# Altium PCB blankPCB.PcbDoc
Units mil, origin at the board's own origin, x right, y up, seen from the top; angles counter-clockwise.
Board outline 6005 x 3025 mil, 2 copper layers (Top Layer, Bottom Layer); 27 components, 48 nets, 167 pads, 129 vias.
Unrouted connection lines stored in the file: 20.
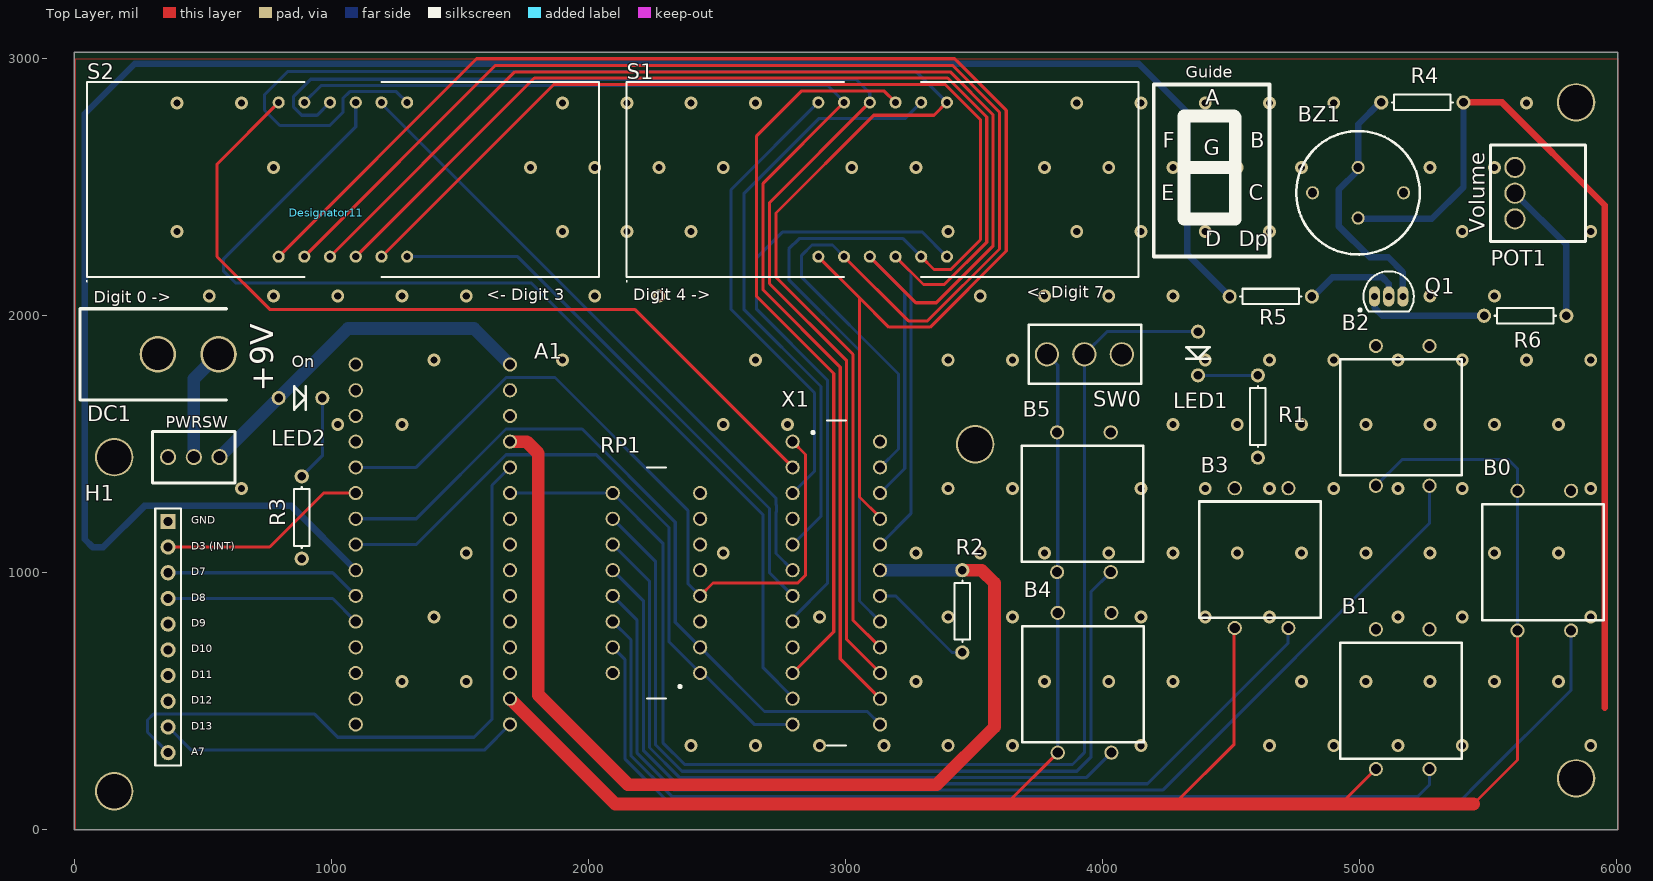
[diagram p0: Top Layer view]
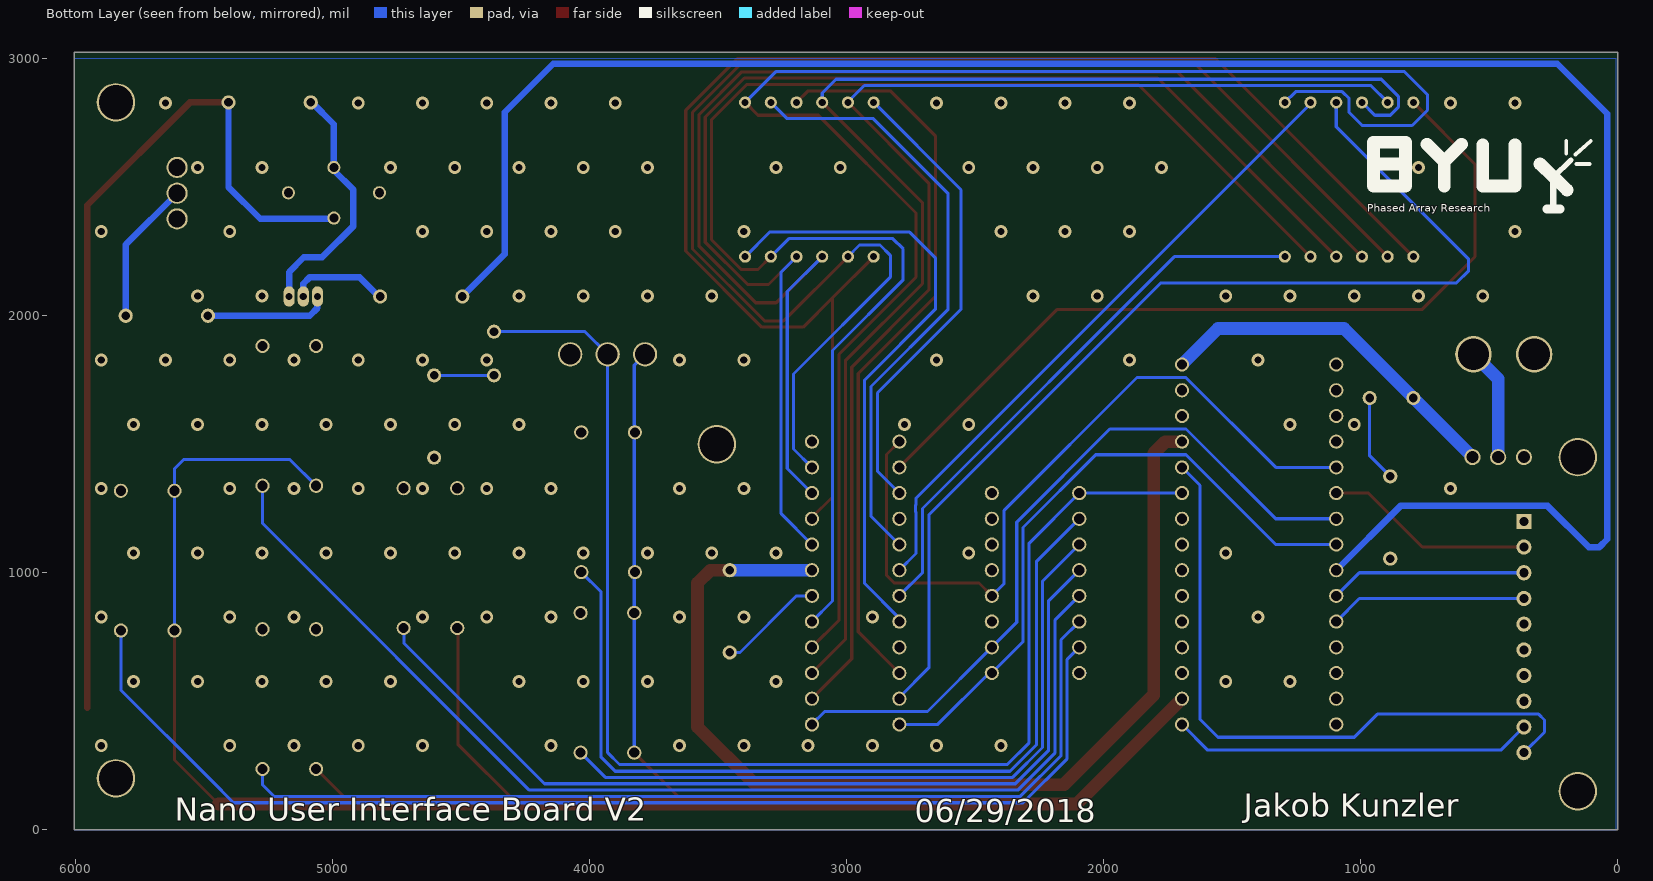
[diagram p1: Bottom Layer view, seen from below]

## Layer stack, top to bottom
Top Solder: solder mask 0.4, Solder Resist, Dk 3.5
Top Layer: signal copper 1.4
Dielectric 1: dielectric 12.6, FR-4, Dk 4.8
Bottom Layer: signal copper 1.4
Bottom Solder: solder mask 0.4, Solder Resist, Dk 3.5

## Board outline
0,0 0,3025 6005,3025 6005,0

## Design rules (kind name [scope] priority, off if disabled: settings)
BoardOutlineClearance [All] p1: gap=15 ignorepadtopadclearanceinfootprint=FALSE
Clearance [All] p1: gap=12 ignorepadtopadclearanceinfootprint=TRUE
ComponentClearance "BYU LOGO" [HasFootprint('BYU_Logo')] p1: gap=0 collisioncheckmode=3 verticalgap=0 showdistances=FALSE
ComponentClearance [All] p2: gap=1 collisioncheckmode=3 verticalgap=1 showdistances=FALSE
DiffPairsRouting [All] p1: maxlimit=393.7 minlimit=6 mostfreqgap=8 toplayer_minwidth=6 toplayer_maxwidth=15 toplayer_prefwidth=8 bottomlayer_minwidth=6 bottomlayer_maxwidth=15 bottomlayer_prefwidth=8 maxuncoupledlength=500
HoleSize [All] p1: absolutevalues=TRUE maxlimit=265 minlimit=10 maxpercent=80.000 minpercent=20.000
HoleToHoleClearance [All] p1: gap=10 allowstackedmicrovias=FALSE
MinimumAnnularRing [All] p1: minimumring=7
MinimumSolderMaskSliver [All] p1: minsoldermaskwidth=0
PlaneClearance [All] p1: clearance=10
PlaneConnect [All] p1: planeconnectstyle=Direct reliefexpansion=16 reliefentries=4 reliefconductorwidth=6 reliefairgap=6
PolygonConnect [All] p1: connectstyle=Relief reliefconductorwidth=8 reliefentries=4 polygonreliefangle="90 Angle" airgapwidth=6
RoutingCorners [All] p1: cornerstyle=45-Degree minsetback=49.21 maxsetback=49.21
RoutingVias [All] p1: holewidth=15 width=30 viastyle="Through Hole" minholewidth=13 minwidth=27 maxholewidth=100 maxwidth=114
SilkToSilkClearance [All] p1: silktosilkclearance=0
SilkToSolderMaskClearance [IsPad] p1: minsilkscreentomaskgap=6 clearancetoexposedcopper=TRUE
SolderMaskExpansion [All] p1: expansion=2.95
Width [All] p1: maxlimit=400 minlimit=6 preferedwidth=8
20 further rules are at their usual default settings.

## Classes and differential pairs
component class U_Sound: BZ1 POT1 Q1 R4 R5 R6
component class U_ButtonAndSwitches: B0 B1 B2 B3 B4 B5 LED1 R1 SW0
component class U_ArduinoNano: A1
component class U_7segments: R2 S1 S2 X1
component class TopLevel: DC1 H1 LED2 PWRSW R3 RP1

## Components (designator, comment, footprint, x,y, rotation, side; value= is the part's Value field where it differs from the comment)
A1 "DFR0010" ArduinoNano 1095.17,1809.99 r0 top
B0 "COM-09190" COM-09190 5615.24,775 r0 top
B1 "COM-09190" COM-09190 5064.05,236.22 r0 top
B2 "COM-09190" COM-09190 5064.05,1338.58 r0 top
B3 "COM-09190" COM-09190 4515,785 r0 top
B4 "COM-09190" COM-09190 3826.34,300 r0 top
B5 "COM-09190" COM-09190 3823.84,1002.5 r0 top
BZ1 "PS1240P02BT" PS1240P02BT 4995,2478.43 r0 top
DC1 "PJ-037A" PJ-037A 561.22,1850 r180 top
Designator11 "Comment" BYU_Logo 980,2400 r180 top
H1 "68016-210HLF" Header1X10 365,1200 r270 top
LED1 "LTL-4223" "LED Through" 4372.08,1948 r270 top
LED2 "LTL-4223" "LED Through" 785,1680 r0 top
POT1 "3310R-125-103L" 3310R-001 5605,2576.85 r270 top
PWRSW "200MSP1T1B1M2QEH" 200MSP1T1B1M2QEH 365,1450 r0 top
Q1 "2N3904BU" 2N3904 5114.05,2075 r270 top
R1 "100" "Resistor Through Hole" 4604.99,1768 r270 top
R2 "9.53k" "Resistor Through Hole" 3455,690 r90 top
R3 "1k" "Resistor Through Hole" 885,1375 r270 top
R4 "1k" "Resistor Through Hole" 5405,2830 r180 top
R5 "100" "Resistor Through Hole" 4815,2075 r180 top
R6 "18" "Resistor Through Hole" 5805,2000 r180 top
RP1 "4116R-2-103LF" 4100R 2265.08,960 r180 top
S1 "LDQ-N516RI" LDQ-516RI 2895,2230 r90 top
S2 "LDQ-N516RI" LDQ-516RI 795,2230 r90 top
SW0 "SLG12014" SLG12014 4075.67,1850 r180 top
X1 "MAX7219CNG+" MAX7219 2965.08,960 r0 top

## Footprints (in the part's own frame and the unit in brackets; to place one, negate y for a bottom-side part, rotate by r counter-clockwise, add the part's x,y. Pads: shape width x height; smd on the part's side, far side on the other; paste and mask are expansions set on the pad)
2N3904 [mm] "TO, Flat Index; 3 In-Line, Axial Leads; Body Dia. 4.5mm; Leads 0.51 x 0.48 mm (max)"
  oval 2x1.1 hole 0.7: 1(0,-1.397) 2(0,0) 3(0,1.397)
  silkscreen extent -2.48,-2.95 1.5,2.48, body extent -2.48,-2.5 1.5,2.5, height 6.86
200MSP1T1B1M2QEH [mm]
  round 1.6 hole 1.2: 1(0,0) 2(5.08,0) 3(2.54,0)
  silkscreen extent -1.52,-2.54 6.6,2.53, body extent -1.52,-2.54 10.53,2.54, height 22.22
3310R-001 [mm]
  round 2.1 hole 1.7: 1(0,0) 2(2.54,0) 3(5.08,0)
  silkscreen extent -2.22,-2.41 7.31,6.99, body extent -2.22,-2.54 13.84,8.38, height 17.91
4100R [mm] "SOJ, 16-Leads, Body 32.13x8.89mm, Pitch 2.54mm, IPC Low Density"
  round 1.4 hole 1: 1(-4.32,8.89) 2(-4.32,6.35) 3(-4.32,3.81) 4(-4.32,1.27) 5(-4.32,-1.27) 6(-4.32,-3.81) 7(-4.32,-6.35) 8(-4.32,-8.89) 9(4.32,-8.89) 10(4.32,-6.35) 11(4.32,-3.81) 12(4.32,-1.27) 13(4.32,1.27) 14(4.32,3.81) 15(4.32,6.35) 16(4.32,8.89)
  silkscreen extent -2.45,-11.42 0.95,11.42, body extent -4.65,-11.43 4.64,11.43, height 4.57
ArduinoNano [mm]
  round 1.4 hole 1: 1(-0.004,0) 2(-0.004,-2.54) 3(-0.004,-5.08) 4(-0.004,-7.62) 5(-0.004,-10.16) 6(-0.004,-12.7) 7(-0.004,-15.24) 8(-0.004,-17.78) 9(-0.004,-20.32) 10(-0.004,-22.86) 11(-0.004,-25.4) 12(-0.004,-27.94) 13(-0.004,-30.48) 14(-0.004,-33.02) 15(-0.004,-35.56) 16(15.236,-35.56) 17(15.236,-33.02) 18(15.236,-30.48) 19(15.236,-27.94) 20(15.236,-25.4) 21(15.236,-22.86) 22(15.236,-20.32) 23(15.236,-17.78) 24(15.236,-15.24) 25(15.236,-12.7) 26(15.236,-10.16) 27(15.236,-7.62) 28(15.236,-5.08) 29(15.236,-2.54) 30(15.236,0)
  body extent -1.27,-39.37 16.51,3.81, height 7.62
BYU_Logo [mil]
COM-09190 [mm]
  round 1.4 hole 1: 1(0,0) 1(0,13.816) 2(5.3,0) 2(5.3,13.816)
  silkscreen extent -3.5,1.02 8.5,12.5, body extent -3.5,-0.63 8.5,14.45, height 9.1
Header1X10 [mm] "Connector; Header; 10 Position"
  rect 1.5x1.5 hole 0.9: 1(0,0)
  round 1.5 hole 0.9: 2(2.54,0) 3(5.08,0) 4(7.62,0) 5(10.16,0) 6(12.7,0) 7(15.24,0) 8(17.78,0) 9(20.32,0) 10(22.86,0)
  silkscreen extent -1.27,-1.27 24.13,1.27, body extent -1.27,-9.02 24.13,0.63, height 2.92
LDQ-516RI [mm]
  round 1.2 hole 0.7: 1(0,0) 2(0,-2.54) 3(0,-5.08) 4(0,-7.62) 5(0,-10.16) 6(0,-12.7) 7(15.24,-12.7) 8(15.24,-10.16) 9(15.24,-7.62) 10(15.24,-5.08) 11(15.24,-2.54) 12(15.24,0)
  silkscreen extent -2.48,-31.65 17.27,19, body extent -1.88,-31.5 17.12,18.8, height 8
"LED Through" [mm]
  round 1.4 hole 0.85: 1(0.254,0) 2(4.572,0)
  silkscreen extent 1.78,-1.14 2.92,1.14, body extent -0.23,-2.53 5.06,2.54, height 5.59
MAX7219 [mm] "SOJ, 24-Leads, Body 32.13x8.89mm, Pitch 2.54mm, IPC Low Density"
  round 1.4 hole 1: 1(-4.32,13.97) 2(-4.32,11.43) 3(-4.32,8.89) 4(-4.32,6.35) 5(-4.32,3.81) 6(-4.32,1.27) 7(-4.32,-1.27) 8(-4.32,-3.81) 9(-4.32,-6.35) 10(-4.32,-8.89) 11(-4.32,-11.43) 12(-4.32,-13.97) 13(4.32,-13.97) 14(4.32,-11.43) 15(4.32,-8.89) 16(4.32,-6.35) 17(4.32,-3.81) 18(4.32,-1.27) 19(4.32,1.27) 20(4.32,3.81) 21(4.32,6.35) 22(4.32,8.89) 23(4.32,11.43) 24(4.32,13.97)
  silkscreen extent -2.45,-16.05 0.95,16.05, body extent -4.64,-16.07 4.64,16.06, height 4.57
PJ-037A [mm]
  round 3.6 hole 3.1: 1(0,0) 2(6,0)
  silkscreen extent -0.8,-4.5 13.7,4.5, body extent -0.8,-4.5 13.7,4.5, height 11
PS1240P02BT [mm] "Buzzer"
  round 1.3 hole 0.9: 1(0,-2.5) 2(0,2.5) ""(-4.5,0) ""(4.5,0)
  silkscreen extent -6.1,-6.1 6.1,6.1, body extent -6.1,-6.1 6.1,6.1, height 6.5
"Resistor Through Hole" [mm]
  round 1.4 hole 0.85: 1(0,0) 2(8.128,0)
  silkscreen extent 1.04,-0.76 7.09,0.76, body extent -0.38,-0.89 8.51,0.89, height 1.77
SLG12014 [mm]
  round 2.4 hole 2: 1(0,0) 2(7.4,0) 3(3.7,0)
  silkscreen extent -1.9,-2.9 9.2,2.9, body extent -1.8,-2.85 9.2,2.85, height 8.9

## Part data
A1: library part ArduinoNano, "DFRDUINO NANO V3.1 (ARDUINO NANO", Supplier Part Number 1=1738-1026-ND, ComponentLink1Description=1738-1026-ND, ComponentLink1URL=https://www.digikey.com/product-detail/en/dfrobot/DFR0010/1738-1026-ND/6588448, Supplier 1=Digi-Key
B0 B1 B2 B3 B4 B5: library part "Push Button_Tactile", "Momentary Pushbutton Switch - 12mm Square", Supplier Part Number 1=CW181-ND, ComponentLink2Description="Momentary Pushbutton Switch - 12mm Square", ComponentLink2URL=https://www.sparkfun.com/products/9190, Supplier 1=Digi-Key
BZ1: library part PS12, "Piezo Buzzer, Through Hole", Supplier Part Number 1=445-2525-1-ND, ComponentLink1Description=445-2525-1-ND, ComponentLink1URL=https://www.digikey.com/product-detail/en/tdk-corporation/PS1240P02BT/445-2525-1-ND/935930, Supplier 1=Digi-Key
DC1: library part DCpowerBarrel, "CONN PWR JACK 2X5.5MM SOLDER", Supplier Part Number 1=CP-037A-ND, ComponentLink1Description=CP-037A-ND, ComponentLink1URL=https://www.digikey.com/product-detail/en/cui-inc/PJ-037A/CP-037A-ND/1644545, Supplier 1=Digi-Key
H1: library part "Header 10 Right Angle 100 mil", "Header 10 Right Angle 100 mil", Supplier Part Number 1=609-3322-ND, LatestRevisionDate=17-Jul-2002, LatestRevisionNote="Re-released for DXP Platform.", Publisher="Altium Limited", Supplier 1=Digi-Key
LED1 LED2: library part LED_RED, "2 V drop 10 mA Red", ComponentLink1Description=160-1127-ND, ComponentLink1URL=https://www.digikey.com/product-detail/en/lite-on-inc/LTL-4223/160-1127-ND/200395, Supplier 1=Digi-Key
POT1: library part "Potentiometer - 10k", "POT 10K OHM 1/4W PLASTIC LINEAR", Supplier Part Number 1=3310R-125-103L-ND, ComponentLink1Description=3310R-125-103L-ND, ComponentLink1URL=https://www.digikey.com/product-detail/en/bourns-inc/3310R-125-103L/3310R-125-103L-ND/2537840, Supplier 1=Digi-Key
PWRSW: library part PowerSwitch, "SWITCH TOGGLE SPDT 3A 120V", Supplier Part Number 1=EG2447-ND, ComponentLink1Description=EG2447-ND, ComponentLink1URL=https://www.digikey.com/product-detail/en/e-switch/200MSP1T1B1M2QEH/EG2447-ND/378916, Supplier 1=Digi-Key
Q1: library part 2N3904, "TRANS NPN 40V 0.2A TO-92", Supplier Part Number 1=2N3904FS-ND, ComponentLink1Description="Manufacturer Link", ComponentLink1URL=http://www.fairchildsemi.com/, ComponentLink2Description=Datasheet, ComponentLink2URL=http://www.fairchildsemi.com/ds/2N%2F2N3904.pdf, ComponentLink3Description=2N3904FS-ND, ComponentLink3URL=https://www.digikey.com/product-detail/en/on-semiconductor/2N3904BU/2N3904FS-ND/1413, DatasheetVersion=1997, LatestRevisionDate=15-Jan-2003, LatestRevisionNote="PCB Footprint 'BCY-W3/D4.7' replaced", PackageDescription="TO, Flat Index; 3 In-Line, Axial Leads; Body Dia. 4.5mm; Leads 0.51 x 0.48 mm (max)", PackageReference=TO-92A, PackageVersion=Sep-1998, Published=8-Jun-2000, Publisher="Altium Limited", Supplier 1=Digi-Key
R1 R5: library part Resistor_100, "CF14JT100R", ComponentLink1Description=CF14JT100RCT-ND, ComponentLink1URL=https://www.digikey.com/product-detail/en/stackpole-electronics-inc/CF14JT100R/CF14JT100RCT-ND/1830327, Supplier 1=Digi-Key
R2: library part Resistor_9.53k, "MFR-25FBF52-9K53", ComponentLink1Description=9.53KXBK-ND, ComponentLink1URL=https://www.digikey.com/product-detail/en/yageo/MFR-25FBF52-9K53/9.53KXBK-ND/13215, Supplier 1=Digi-Key
R3 R4: library part Resistor_1k, "CF14JT1K00", ComponentLink1Description=CF14JT1K00TR-ND, ComponentLink1URL=https://www.digikey.com/product-detail/en/stackpole-electronics-inc/CF14JT1K00/CF14JT1K00TR-ND/1741314, Supplier 1=Digi-Key
R6: library part Resistor_18, "CF14JT18R0", Supplier 1=Digi-Key
RP1: library part ResistorPack15, Supplier Part Number 1=4116R-2-103LF-ND, Supplier 1=Digi-Key
S1 S2: library part SevenSegment, "LED 7-SEG .56 QUAD S-RED CC MULT", Supplier Part Number 1=67-1450-ND, ComponentLink1Description=67-1450-ND, ComponentLink1URL=https://www.digikey.com/products/en?keywords=LDQ-N516RI, Supplier 1=Digi-Key
SW0: library part SlideSwitch, "SWITCH SLIDE SPDT 300MA 125V", Supplier Part Number 1=679-3535-ND, ComponentLink1Description=679-3535-ND, ComponentLink1URL=https://www.digikey.com/product-detail/en/apem-inc/SLG12014/679-3535-ND/1797348, Supplier 1=Digi-Key
X1: library part MAX7219, "Serially Interfaced, 8-Digit LED Display Driver", Supplier Part Number 1=MAX7219CNG+-ND, ComponentLink1Description=MAX7219CNG+-ND, ComponentLink1URL=https://www.digikey.com/product-detail/en/maxim-integrated/MAX7219CNG/MAX7219CNG-ND/948191, Supplier 1=Digi-Key

## Free pads (board coordinates)
  round 149.61 hole 133.86: 2(155,150) 2(155,1450) 2(3505,1500) 2(5842.84,200) 3(5842.84,2830)

## Via types
v1: diameter 50, hole 28, Top Layer to Bottom Layer, tented both sides, 129 vias

## Nets (pads, with @x,y where several pads share a name; then routed paths per layer and width w, separated by ;. In a path a pad name is that pad's centre, name@x,y a point inside that pad or via, vN(x,y) a via of type N, cw(c..) or ccw(c..) an arc to the next point about the centre after c; other vN are vias at no path point)
7S_CS*: A1.8 RP1.1 X1.12 | length 2539.7
  Top Layer w12: RP1.1 RP1.1@2445,610
  Bottom Layer w12: A1.8 1330.57,1110 1679.57,1459 2031,1459 2314,1176 2314,731.16 RP1.1 ; RP1.1@2445,610 2645,410 X1.12
+3.3V: A1.17 B0.1 B1.1 B2.1 B3.1 B4.1 B5.1 SW0.2 | length 8738.9
  Top Layer w12: A1.17@1695,500 A1.17 ; 3626.34,100 B4.1@3826.34,300 ; 4280,100 4512.87,332.87 B3.1@4512.87,787.4 ; 4927.83,100 B1.1@5064.05,236.22 ; 5443.78,100 5615.24,271.46 B0.1@5615.24,775
  Top Layer w50: A1.17 2015,190 2105,100 3626.34,100 4280,100 4927.83,100 5443.78,100
  Bottom Layer w12: SW0.2 3826.34,1807.99 B4.1@3826.34,300 ; B2.1@5064.05,1338.58 5165.47,1440 5580,1440 5615.24,1404.76 B0.1@5615.24,775
+5V: A1.27 R2.2 X1.19 | length 4107.4
  Top Layer w50: A1.27 1760,1510 1805,1465 1805,525 2155,175 3355,175 3580,400 3580,960 3530,1010 R2.2
  Bottom Layer w50: X1.19 R2.2
+9V: A1.30 BZ1.1 LED2.1 PWRSW.2 R4.1 | length 4856.8
  Top Layer w25: R4.1 5555,2830 5955,2430 5955,475
  Bottom Layer w25: BZ1.1@4995,2376.85 5281.85,2376.85 5405,2500 R4.1
  Bottom Layer w50: PWRSW.2 1065,1950 1555,1950 A1.30
A: S1.11 S2.11 X1.14 | length 4794.9
  Top Layer w12: S1.11 2680,2515 2680,2100 2980,1800 2980,665.16 X1.14
  Bottom Layer w12: S2.11 961,2896 2931,2896 2995,2832 S1.11
A7: A1.26 H1.10 | length 2585.3
  Bottom Layer w12: H1.10 284.94,380.06 284.94,427.44 307.5,450 935,450 1025,360 1555,360 1625,430 1625,1340 A1.26
B: S1.7 S2.7 X1.16 | length 6186.1
  Top Layer w12: X1.16 3030,815.16 3030,1850 2730,2150 2730,2400 3110,2780 3345,2780 S1.7
  Bottom Layer w12: S2.7 1253,2872 1072,2872 1045,2845 1045,2791 994,2740 800,2740 740,2800 740,2860 829.5,2949.5 3275.5,2949.5 S1.7
B0_o: A1.19 B0.2 RP1.15 | length 4618.3
  Bottom Layer w12: RP1.15 2142,663 2142,277 2313.75,105.25 5385.25,105.25 5476,196 5823.9,543.9 B0.2@5823.9,775
B1_o: A1.20 B1.2 RP1.14 | length 3803.4
  Bottom Layer w12: RP1.14 2166,739 2166,288 2324,130 5227.72,130 5272.72,175 B1.2@5272.72,236.22
B2_o: A1.21 B2.2 RP1.13 | length 4369.6
  Bottom Layer w12: RP1.13 2190,815 2190,298 2333.7,154.3 4234.3,154.3 5272.72,1192.72 5272.72,1330 B2.2@5272.72,1338.58
B3_o: A1.22 B3.2 RP1.12 | length 3600.2
  Bottom Layer w12: RP1.12 2214,891 2214,309 2343.95,179.05 4175.58,179.05 4721.54,725 B3.2@4721.54,787.4
B4_o: A1.23 B4.2 RP1.11 | length 2734.2
  Bottom Layer w12: RP1.11 2238,967 2238,320 2354.2,203.8 3938.8,203.8 B4.2@4035,300
B5_o: A1.24 B5.2 RP1.10 | length 3459.5
  Bottom Layer w12: RP1.10 2262,1043 2262,330 2364.16,227.84 3900.84,227.84 3955,282 3955,925 B5.2@4032.5,1002.5
Buzz: A1.9 R5.2 | length 8124.6
  Bottom Layer w25: A1.9 845,1260 273,1260 113,1100 71,1100 41,1130 41,1567 41,2786 235,2980 4141.54,2980 4330,2791.54 4330,2240 R5.2
C: S1.4 S2.4 X1.20 | length 4955.6
  Top Layer w12: S2.4 1790,2925 3398,2925 3550,2773 3550,2286.06 3385.23,2121.29 3303.71,2121.29 S1.4
  Bottom Layer w12: X1.20 3255,1229.84 3255,2170 S1.4
D: S1.2 S2.2 X1.23 | length 5655.6
  Top Layer w12: S2.2 1639,2974 3417,2974 3599.87,2791.12 3599.87,2259.95 3319.79,1979.87 3245.13,1979.87 S1.2
  Bottom Layer w12: S1.2 2950,2275 2870,2275 2830,2235 2830,2150 3207,1773 3207,1481.84 X1.23
D3: A1.6 H1.2 | length 817
  Top Layer w12: H1.2 760,1100 970,1310 A1.6
D7: A1.10 H1.3 | length 767.3
  Bottom Layer w12: H1.3 1005,1000 A1.10
D8: A1.11 H1.4 | length 767.3
  Bottom Layer w12: H1.4 1005,900 A1.11
D9: A1.12 H1.5
D10: A1.13 H1.6 | length 7.1
  Top Layer w12: A1.13 A1.13@1100,605
D11: A1.14 H1.7
D12: A1.15 H1.8 | length 3.5
  Top Layer w12: A1.15 A1.15@1097.5,407.5
D13: A1.16 H1.9 | length 1408.7
  Bottom Layer w12: H1.9 455,310 1595,310 A1.16
Dclk: A1.7 RP1.2 X1.13 | length 2889.1
  Bottom Layer w12: A1.7 1330.57,1210 1679.57,1559 1976.08,1559 2338,1197.08 2338,807.16 RP1.2 2685.16,460 3085.16,460 X1.13
Digit0: S2.12 X1.2 | length 3289.1
  Top Layer w12: S2.12 555,2590 555,2230 760,2025 2180,2025 X1.2
  Bottom Layer w12: X1.2@2785,1410 X1.2
Digit1: S2.9 X1.11 | length 4124.5
  Bottom Layer w12: S2.9 1095,2735 580,2220 580,2175 627,2128 1777,2128 2030,1875 2680,1225 2680,630 2795,515 X1.11
Digit2: S2.8 X1.6 | length 2487.9
  Bottom Layer w12: S2.8@1185,2820 1200,2820 2730,1290 2730,1264.2 2732.72,1261.48 2732.72,1238.52 2730,1235.8 2730,1075 X1.6
Digit3: S2.6 X1.7 | length 2193.2
  Bottom Layer w12: S2.6 1725,2230 2705,1250 2705,1000 X1.7
Digit4: S1.12 X1.3 | length 1830.7
  Bottom Layer w12: X1.3 2880,1395 2880,1700 2555,2025 2555,2490 S1.12
Digit5: S1.9 X1.10 | length 2911.7
  Top Layer w12: X1.10 2955,770 2955,1775 2655,2075 2655,2700 2830,2875 3150,2875 S1.9
Digit6: S1.8 X1.5 | length 2371.9
  Bottom Layer w12: X1.5 2905,1220 2905,1725 2605,2025 2605,2475 2898,2768 3233,2768 S1.8
Digit7: S1.6 X1.8 | length 2405.6
  Bottom Layer w12: X1.8 2795,823 2930,958 2930,1750 2655,2025 2655,2225 2755,2325 3300,2325 S1.6
Din: A1.5 RP1.4 X1.1 | length 2987.8
  Top Layer w12: RP1.4 2485.16,960 2815,960 2845,990 2845,1460 X1.1
  Bottom Layer w12: A1.5 1330,1410 1680,1760 1870,1760 2387,1243 2387,958.16 RP1.4
Dp: S1.3 S2.3 X1.22 | length 5118.6
  Top Layer w12: S2.3 1714,2949 3408,2949 3573.98,2783.02 3575.02,2272.1 3353.5,2050.58 3274.42,2050.58 S1.3
  Bottom Layer w12: S1.3 3231,2094 3231,1405.84 X1.22
E: S1.1 S2.1 X1.21 | length 5640.5
  Top Layer w12: S2.1 1565,3000 3425,3000 3625.94,2799.06 3625.94,2252.08 3329.67,1955.81 3169.19,1955.81 3055,2070 ; S1.1 3055,2070 ; X1.21 3135.16,1214.84 3055,1295 3055,2070
F: S1.10 S2.10 X1.15 | length 5104.7
  Top Layer w12: S1.10 2705,2440 2705,2125 3005,1825 3005,740.16 X1.15
  Bottom Layer w12: S2.10 945,2780 885,2780 853.38,2811.62 853.38,2853.38 920,2920 3041.32,2920 3095,2866.32 S1.10
G: S1.5 S2.5 X1.17 | length 5589.7
  Top Layer w12: S2.5 1865,2900 3389,2900 3526,2763 3526,2296 3410,2180 3345,2180 S1.5
  Bottom Layer w12: X1.17 3055,890.16 3055,1865 2780,2140 2780,2260 2820,2300 3225,2300 S1.5
GND: A1.4 A1.29 DC1.2 H1.1 pad.2 pad.3 POT1.3 R1.2 R3.2 RP1.16 SW0.1 X1.4 X1.9 | length 20
  Bottom Layer w15: RP1.16@2075,610 RP1.16
  other v1: 2400,327.3 2650,327.3 2900,327.3 3150,327.3 3400,327.3 3650,327.3 4150,327.3 4650,327.3 4900,327.3 5150,327.3 5400,327.3 5900,327.3 1275,577.3 1525,577.3 3275,577.3 3775,577.3 4025,577.3 4275,577.3 4775,577.3 5025,577.3 5275,577.3 5525,577.3 5775,577.3 1400,827.3 2900,827.3 3400,827.3 3650,827.3 4150,827.3 4400,827.3 4650,827.3 5150,827.3 5400,827.3 5900,827.3 1525,1077.3 2525,1077.3 3275,1077.3 3525,1077.3 3775,1077.3 4025,1077.3 4275,1077.3 4525,1077.3 4775,1077.3 5025,1077.3 5275,1077.3 5525,1077.3 5775,1077.3 650,1327.3 3400,1327.3 3650,1327.3 4150,1327.3 4400,1327.3 4650,1327.3 4900,1327.3 5150,1327.3 5400,1327.3 5900,1327.3 1025,1577.3 1275,1577.3 2525,1577.3 2775,1577.3 4275,1577.3 4525,1577.3 4775,1577.3 5025,1577.3 5275,1577.3 5525,1577.3 5775,1577.3 1400,1827.3 1900,1827.3 2650,1827.3 3400,1827.3 3650,1827.3 4400,1827.3 4650,1827.3 4900,1827.3 5150,1827.3 5400,1827.3 5650,1827.3 5900,1827.3 525,2077.3 775,2077.3 1025,2077.3 1275,2077.3 1525,2077.3 2025,2077.3 2275,2077.3 3525,2077.3 3775,2077.3 4025,2077.3 4275,2077.3 5275,2077.3 5525,2077.3 400,2327.3 1900,2327.3 2150,2327.3 2400,2327.3 3400,2327.3 3900,2327.3 4150,2327.3 4400,2327.3 4650,2327.3 5400,2327.3 5900,2327.3 775,2577.3 1775,2577.3 2025,2577.3 2275,2577.3 2525,2577.3 3025,2577.3 3275,2577.3 3775,2577.3 4025,2577.3 4275,2577.3 4525,2577.3 4775,2577.3 5275,2577.3 5525,2577.3 400,2827.3 650,2827.3 1900,2827.3 2150,2827.3 2400,2827.3 2650,2827.3 3900,2827.3 4150,2827.3 4400,2827.3 4650,2827.3 4900,2827.3 5650,2827.3
NetBZ1_2: BZ1.2 Q1.3 R4.2 | length 993.3
  Bottom Layer w25: R4.2@5095,2830 R4.2 5080,2830 4995,2745 BZ1.2 4995,2566 4919,2490 4919,2349 5041,2227 5112,2227 5169.05,2169.94 Q1.3@5169.05,2080 ; Q1.3@5164.05,2075 Q1.3@5169.05,2080 ; Q1.3 Q1.3@5169.05,2080 ; Q1.3@5172.17,2083.11 Q1.3@5169.05,2080
NetDC1_1: DC1.1 PWRSW.3 | length 439.9
  Bottom Layer w50: PWRSW.3 465,1753.78 DC1.1
NetLED1_2: LED1.2 R1.1 | length 232.9
  Bottom Layer w12: LED1.2 R1.1
NetLED2_2: LED2.2 R3.1 | length 338.1
  Bottom Layer w12: R3.1 965,1455 LED2.2
NetPOT1_2: POT1.2 R6.1 | length 559.7
  Bottom Layer w25: POT1.2 5805,2276.85 R6.1
NetQ1_1: Q1.1 R6.2 | length 483.4
  Bottom Layer w25: Q1.1 5059.05,2030 5089.05,2000 R6.2
NetQ1_2: Q1.2 R5.1 | length 389.6
  Bottom Layer w25: R5.1 4820,2075 4894,2149 5090,2149 5114.05,2124.94 Q1.2
NetR2_1: R2.1 X1.18 | length 429.4
  Top Layer w12: X1.18@3125,910 X1.18
  Bottom Layer w12: X1.18 3195,910 3415,690 3435,690 R2.1@3455,710
SW0_o: A1.25 LED1.1 RP1.9 SW0.3 | length 5174.6
  Bottom Layer w12: A1.25 RP1.9 2290,1115 2290,339 2375,254 3884,254 3930,300 SW0.3 4018,1938 LED1.1
pads on no net: A1.1 A1.2 A1.3 A1.18 A1.28 BZ1. POT1.1 PWRSW.1 RP1.3 RP1.5 RP1.6 RP1.7 RP1.8 X1.24

## Polygon pours and split planes (outlines as drawn)
GND on Top Layer "Top Layer-GND" (solid, shelved, pour order 0): 5,0 5,3000 6005,3000 6005,0
GND on Bottom Layer "Bottom Layer-GND" (solid, remove dead copper, shelved, pour order 2): 5,0 5,3000 6005,3000 6005,0

## Silkscreen, mask and mechanical layers (free items; w line width, h text height)
Top Overlay:
  lines w15: 4200,2230 4200,2900 4650,2900 4650,2230 4200,2230
  lines w50: 4317.08,2576.85 4317.08,2776.85 ; 4317.08,2576.85 4517.08,2576.85 ; 4317.08,2576.85 4317.08,2376.85 4517.08,2376.85 4517.08,2576.85 ; 4317.08,2576.85 4317.08,2776.85 ; 4317.08,2776.85 4512.08,2776.85 4517.08,2771.85 4517.08,2576.85
  text "Guide" at 4325,2925 h45
  text "A" at 4400,2820 h60
  text "F" at 4235,2653.7 h60
  text "B" at 4575,2653.7 h60
  text "G" at 4395,2625 h60
  text "E" at 4230,2450 h60
  text "C" at 4570,2450 h60
  text "Volume" at 5487,2322 h60 r90
  text "D" at 4400,2270 h60
  text "Dp" at 4530,2270 h60
  text "<- Digit 7" at 3705,2069.92 h45
  text "<- Digit 3" at 1605,2060 h45
  text "Digit 4 ->" at 2175,2059.92 h45
  text "Digit 0 ->" at 75,2050 h45
  text "On" at 846.46,1800 h45
  text "+9V" at 775,1705 h90 r90
  text "GND" at 455,1190 h30
  text "D3 (INT)" at 455,1090 h30
  text "D7" at 455,990 h30
  text "D8" at 455,890 h30
  text "D9" at 455,790 h30
  text "D10" at 455,690 h30
  text "D11" at 455,590 h30
  text "D12" at 455,490 h30
  text "D13" at 455,390 h30
  text "A7" at 455,290 h30
Bottom Overlay:
  text "Jakob Kunzler" at 1455,50 h90
  text "Nano User Interface Board V2" at 5615,35 h90
  text "06/29/2018" at 2735,30 h90
Mechanical 1:
  the board outline again, w12
Mechanical 15:
  lines w50: 4611.3,1043.31 5723.5,1043.31 ; 5167.4,487.2 5167.4,1599.41

## Text inside footprints (layer, text, board x,y; h text height)
Designator11: Bottom Overlay "Phased Array Research" at 975,2405 h30